# Altium PCB ESP32PCBc[1].PcbDoc (part 1 of 3)
Units mil, origin at the board's own origin, x right, y up, seen from the top; angles counter-clockwise.
Board outline 5118.11 x 3346.46 mil, 4 copper layers (L1, L2, L3, L4), stack 61.583 mil thick; 55 components, 53 nets, 223 pads, 182 vias.
Unrouted connection lines stored in the file: 1.
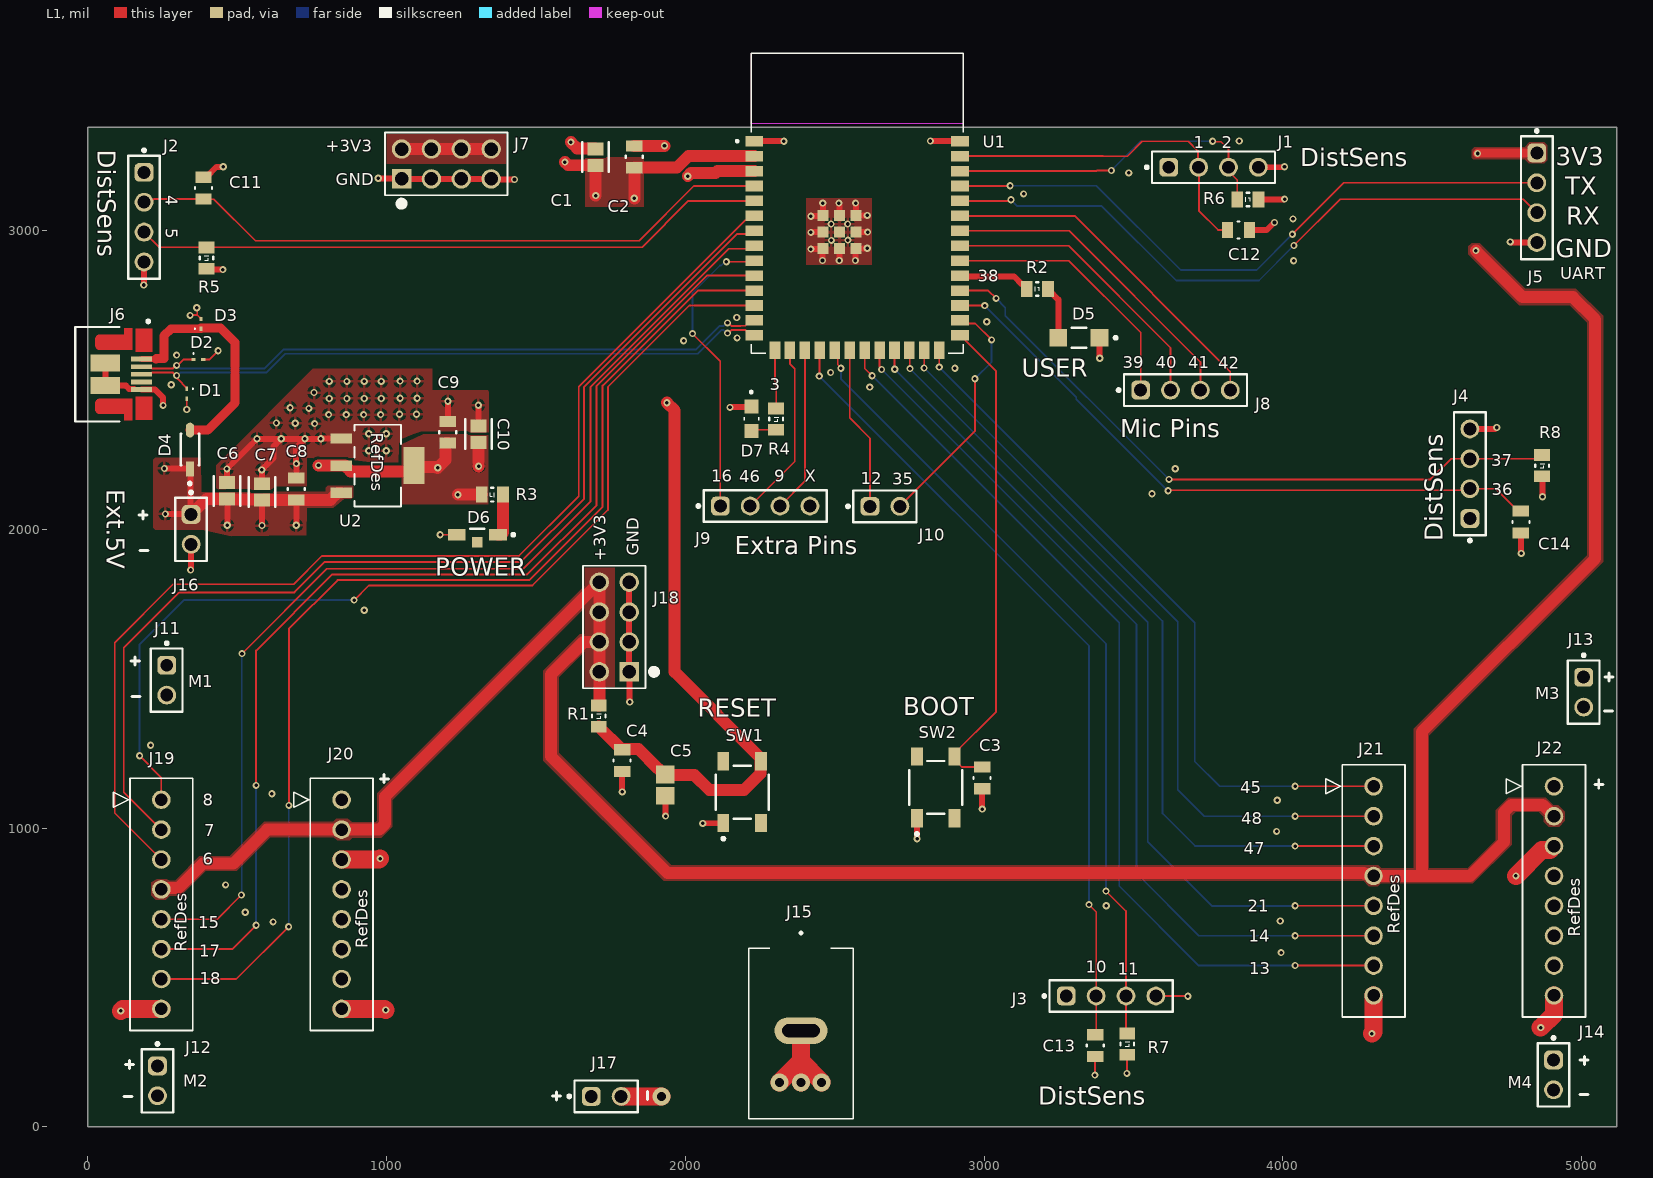
[diagram p0: L1 view]
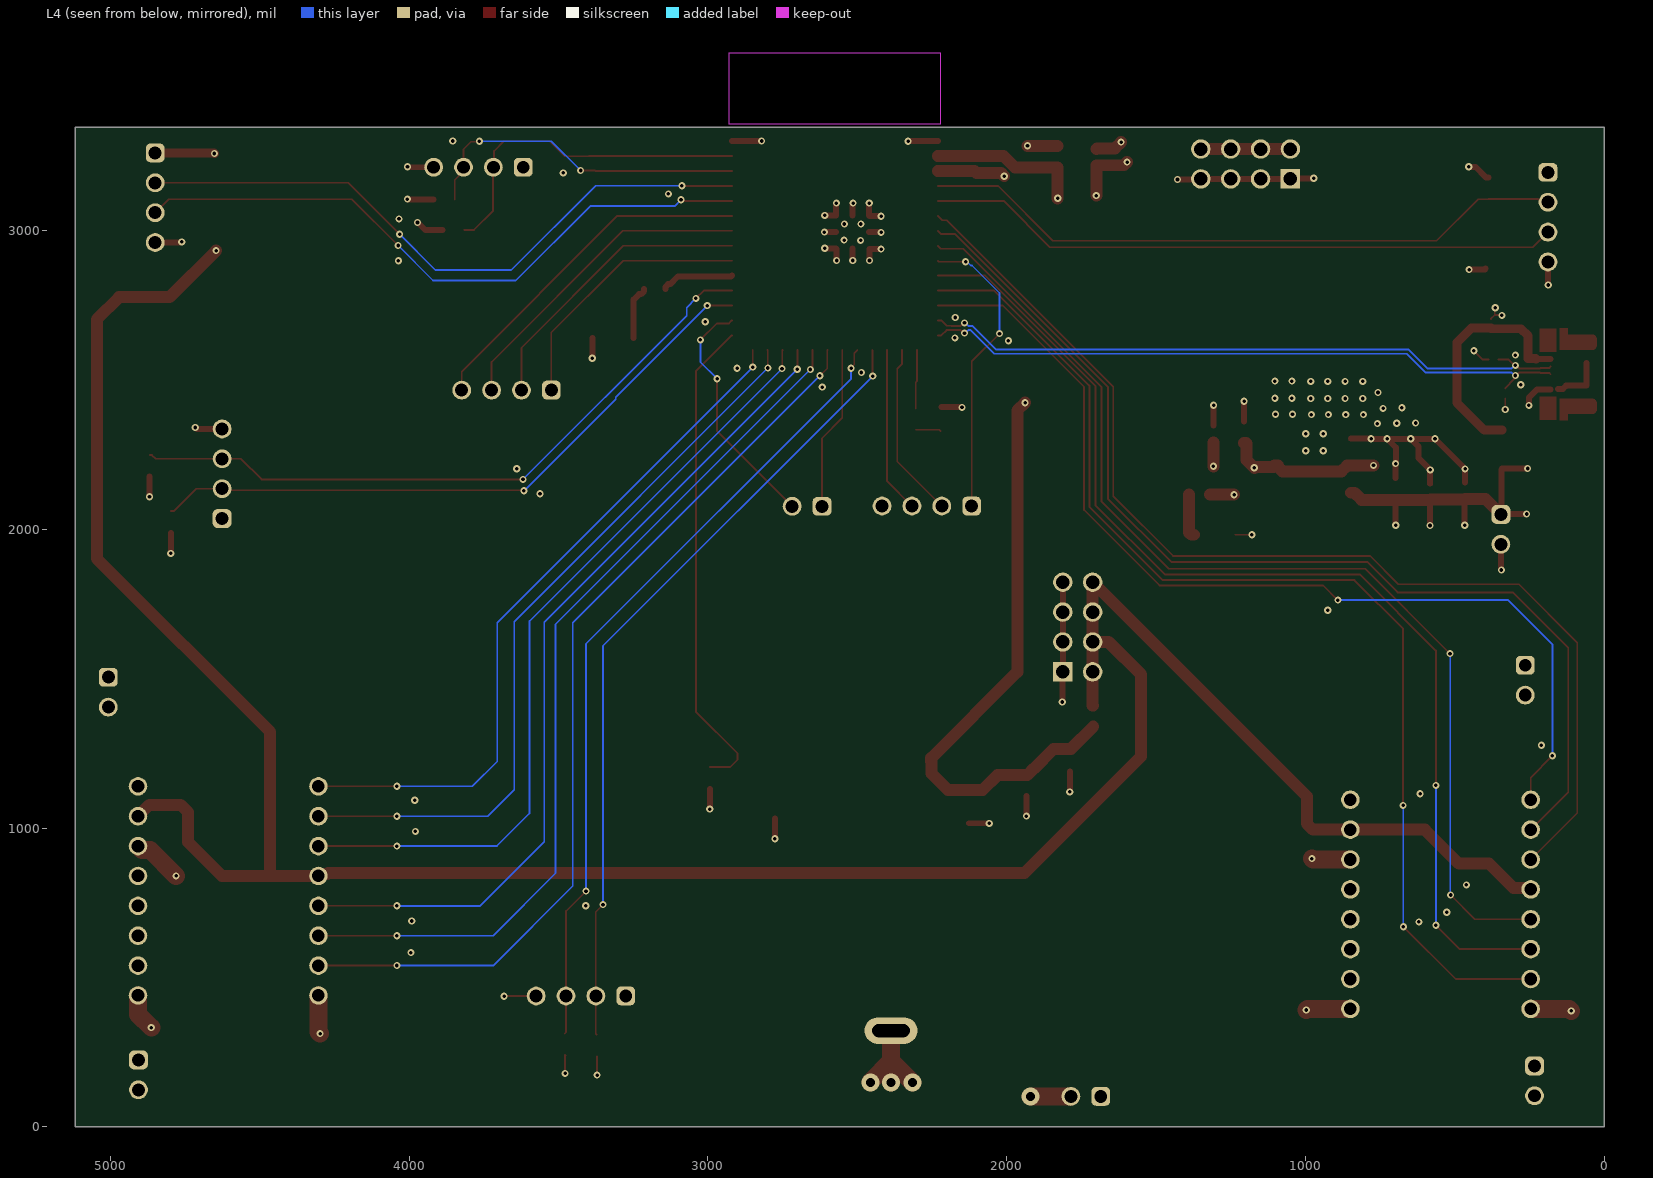
[diagram p1: L4 view, seen from below]
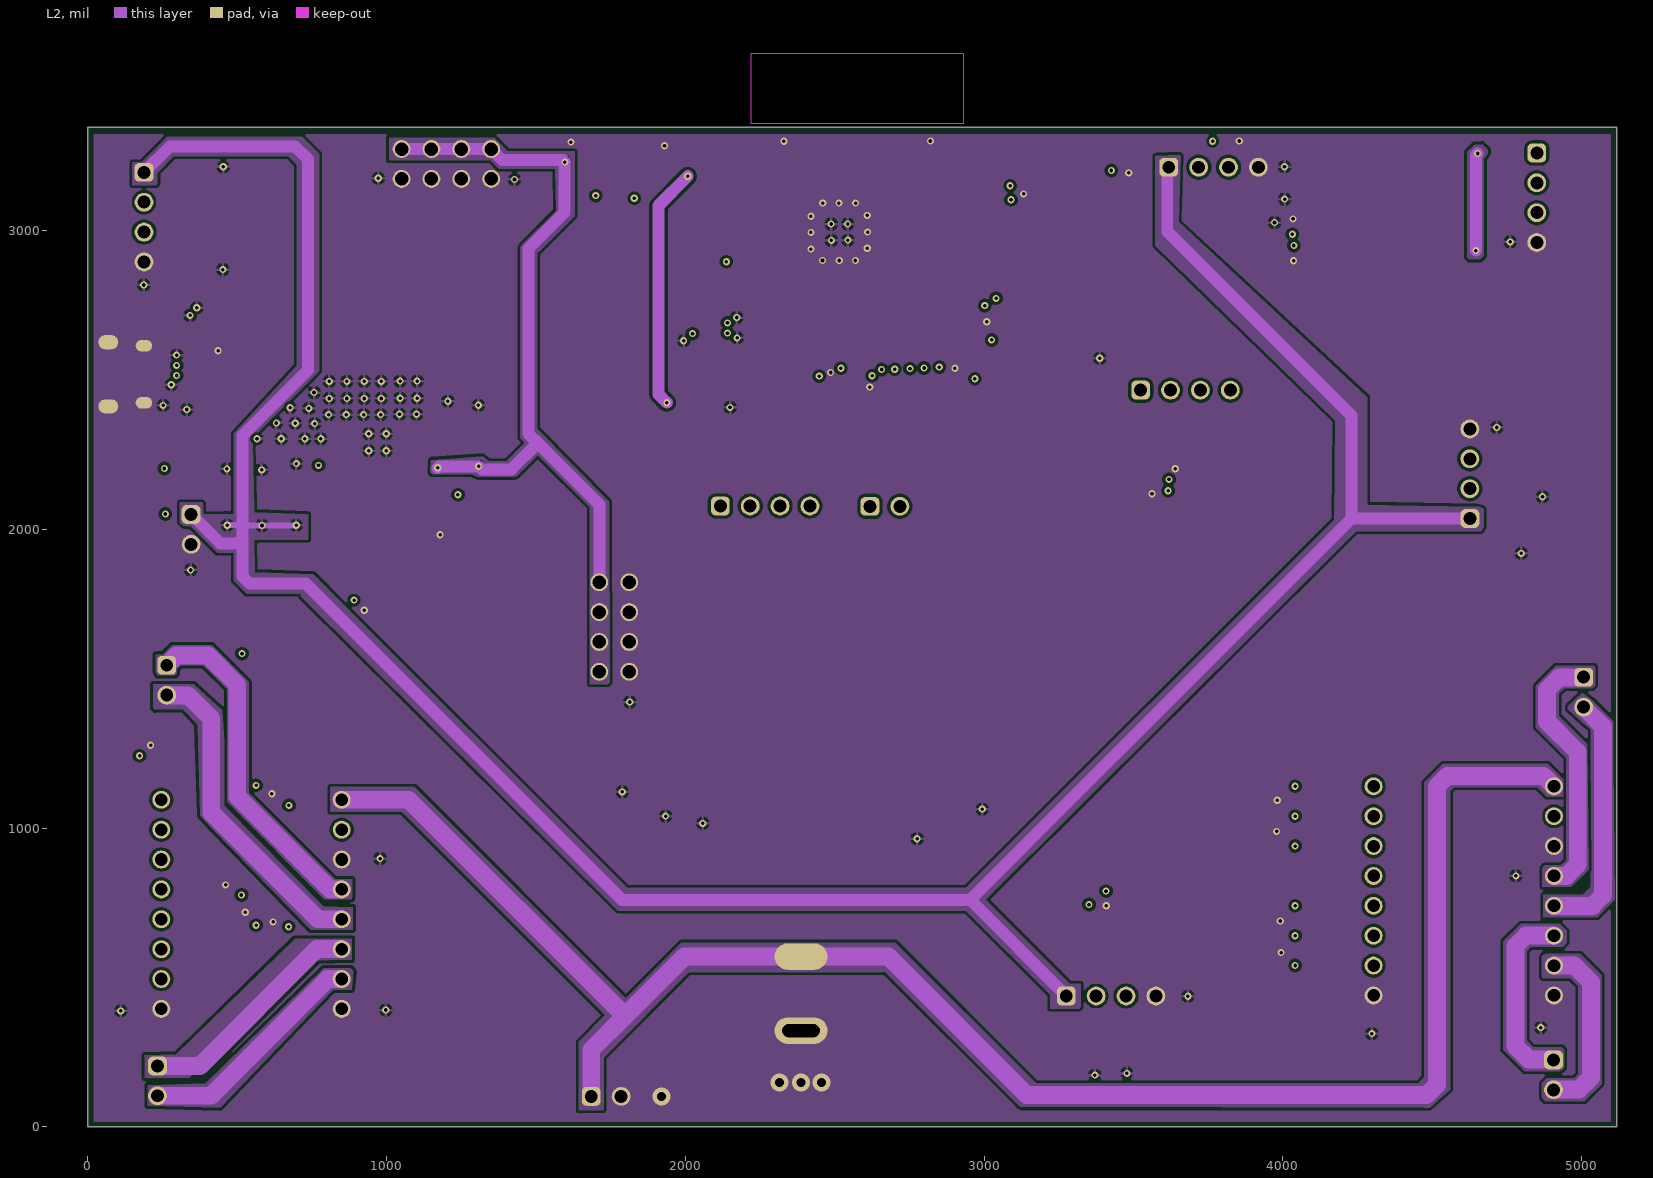
[diagram p2: L2]
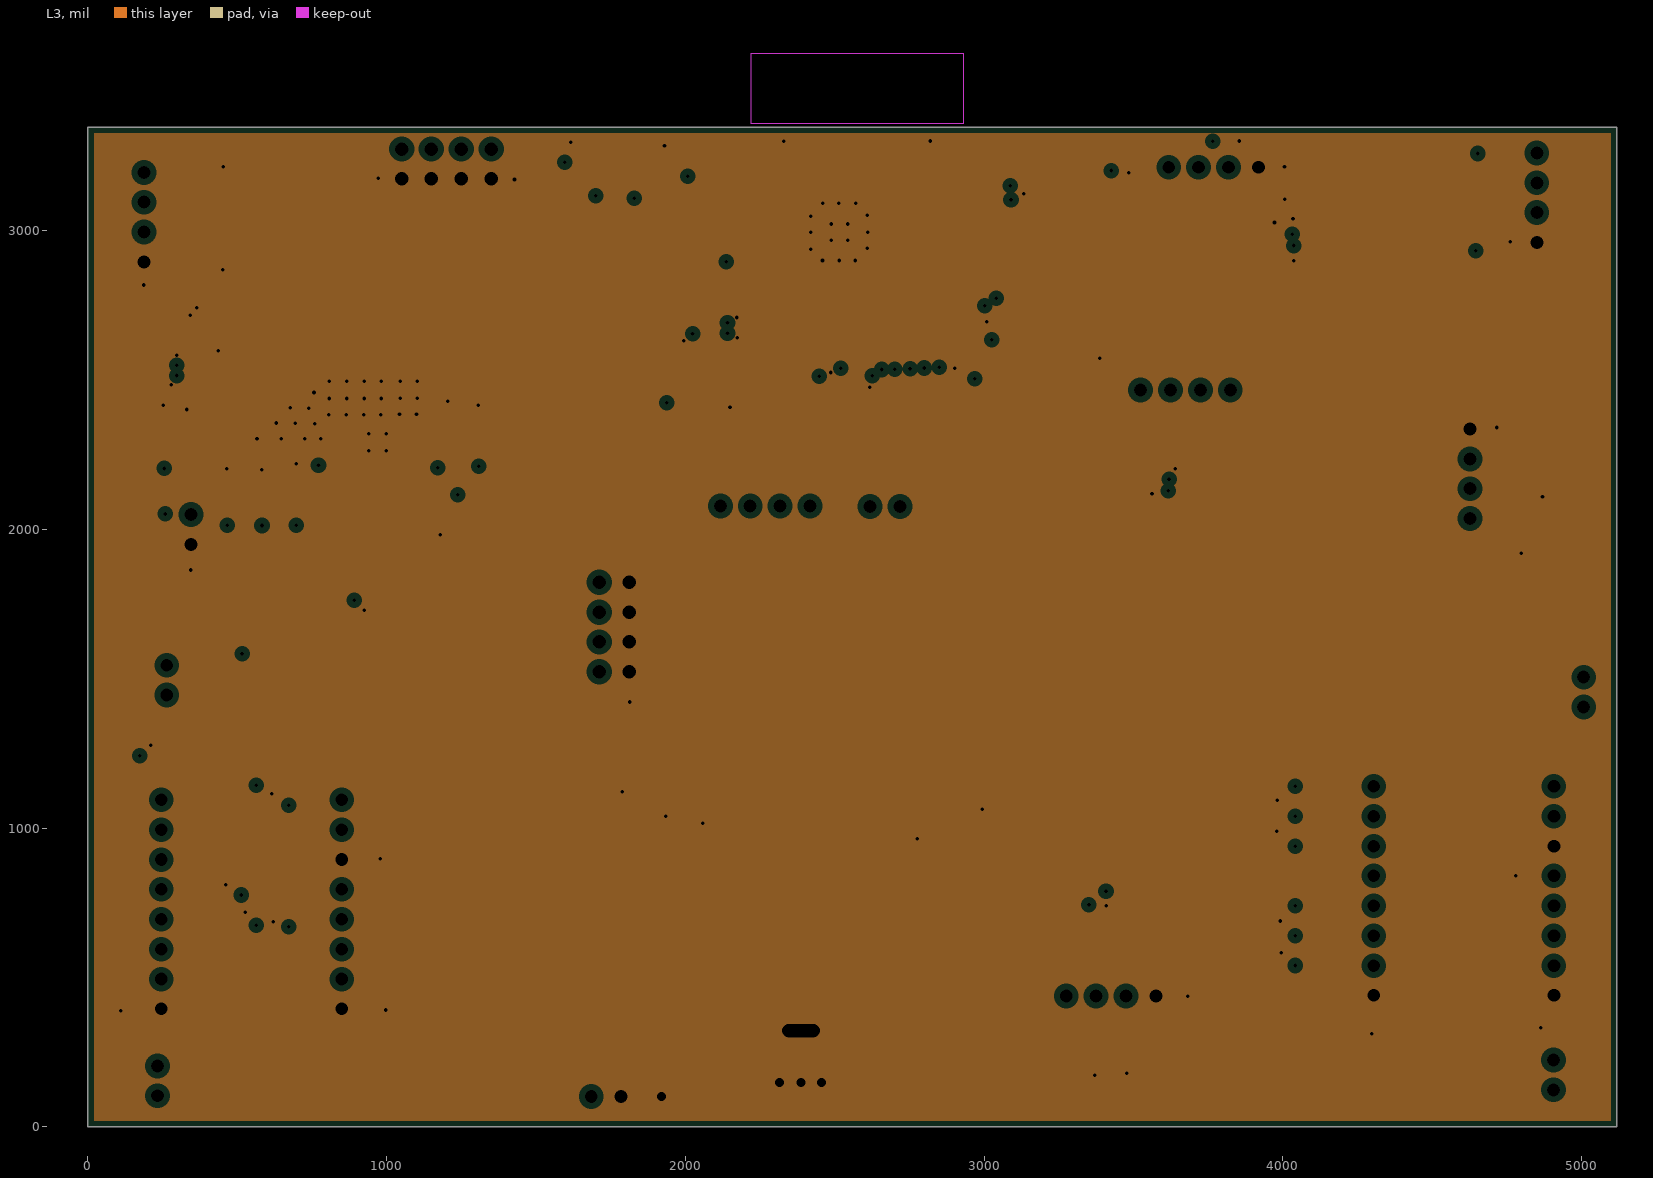
[diagram p3: L3, clearances drawn from the general rule]
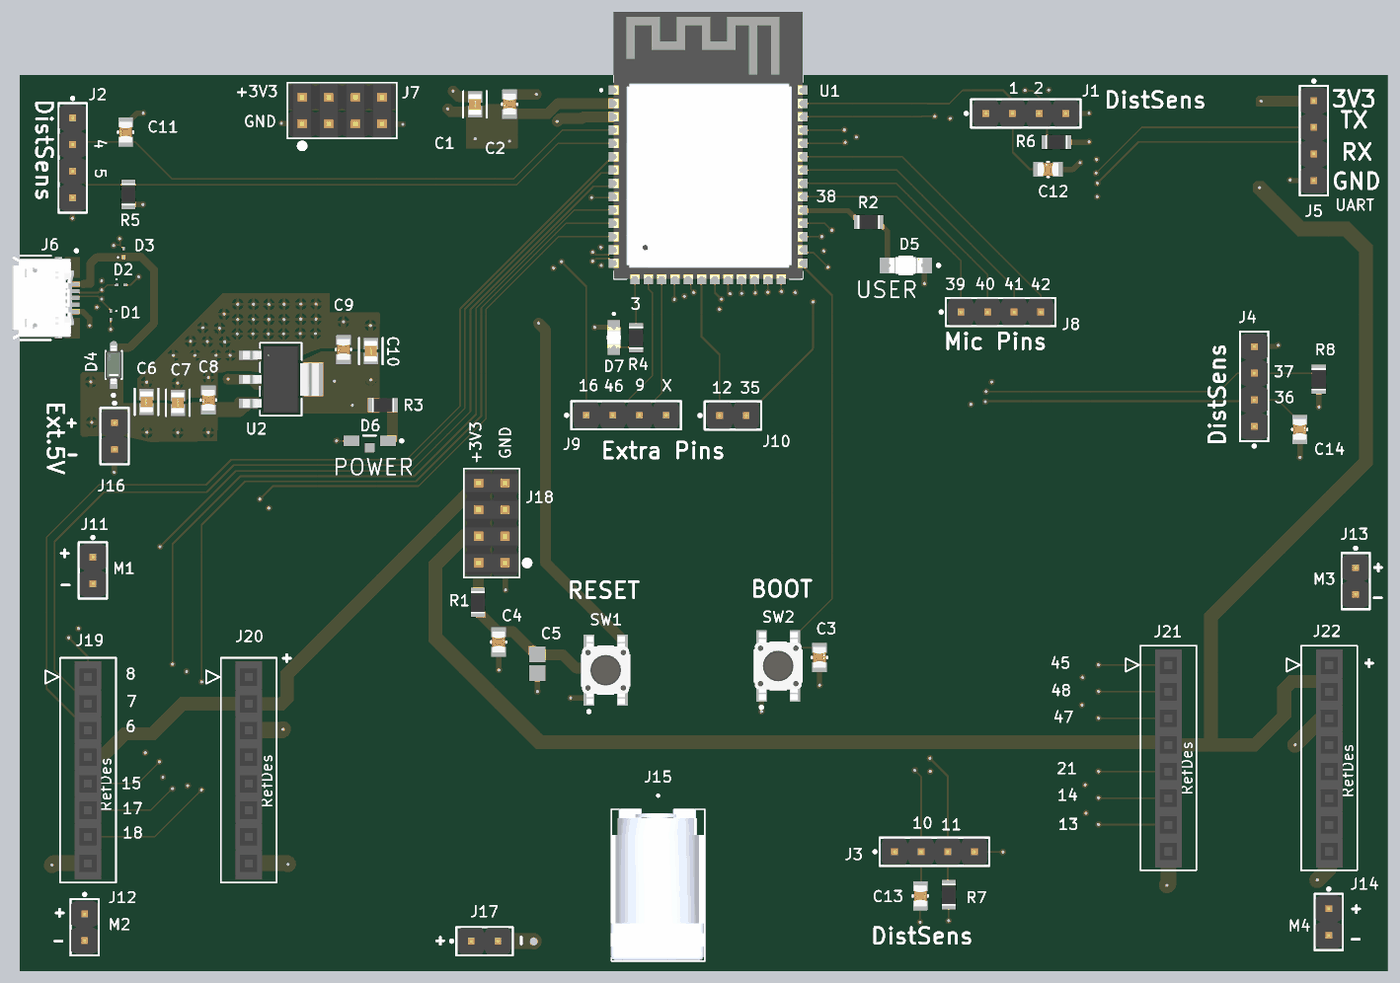
[diagram p4: 3D render of the assembled board from above, using the file's embedded part models]

## Layer stack, top to bottom
Top Solder: solder mask 0.4, Solder Resist, Dk 3.5
L1: signal copper 1.378
Dielectric 2: prepreg 3.9134, PP-006, Dk 4.1
L2: signal copper 0.5984
Dielectric 1: dielectric 49.8031, FR-4, Dk 4.8
L3: plane copper 0.5984, net GND
Dielectric 3: prepreg 3.9134, PP-006, Dk 4.1
L4: signal copper 1.378
Bottom Solder: solder mask 0.4, Solder Resist, Dk 3.5

## Board outline
0,0 5118.11,0 5118.11,3346.46 0,3346.46

## Design rules (kind name [scope] priority, off if disabled: settings)
Clearance "Diff90 s" [InDifferentialPairClass('DIFF90')] p1: gap=10 ignorepadtopadclearanceinfootprint=FALSE except(6: Arc-SMDPad Track-SMDPad SMDPad-SMDPad; 8: Arc-Arc Arc-Track Track-Track)
Clearance Small [WithinRoom('5Vusbnstuff')] p2: gap=10 ignorepadtopadclearanceinfootprint=FALSE except(6: Arc-Arc Arc-Track Arc-SMDPad Track-Track Track-SMDPad SMDPad-SMDPad)
Clearance [All] p3: gap=10 ignorepadtopadclearanceinfootprint=FALSE except(6: Arc-Arc Arc-Track Arc-SMDPad Track-Track Track-SMDPad SMDPad-SMDPad)
DiffPairsRouting DIFF90 [InDifferentialPairClass('DIFF90')] p1: maxlimit=10 minlimit=8 mostfreqgap=10 toplayer_maxgap=8.1 toplayer_prefgap=8 toplayer_minwidth=6.23 toplayer_maxwidth=6.43 toplayer_prefwidth=6.23 midlayer1_mingap=10 midlayer1_minwidth=15 midlayer1_maxwidth=15 midlayer1_prefwidth=15 bottomlayer_maxgap=8.1 bottomlayer_prefgap=8 bottomlayer_minwidth=6.23 bottomlayer_maxwidth=6.43 bottomlayer_prefwidth=6.23 maxuncoupledlength=500
HoleSize [All] p1: absolutevalues=TRUE maxlimit=150 minlimit=1 maxpercent=80.000 minpercent=20.000
MinimumSolderMaskSliver [All] p1: minsoldermaskwidth=4
PlaneClearance [All] p1: clearance=20
PlaneConnect [All] p1: pad.planeconnectstyle=Relief pad.reliefexpansion=20 pad.reliefentries=4 pad.reliefconductorwidth=20 pad.reliefairgap=10 via.planeconnectstyle=Direct via.reliefexpansion=20 via.reliefentries=4 via.reliefconductorwidth=10 via.reliefairgap=10
PolygonConnect [All] p1: connectstyle=Direct reliefconductorwidth=10 reliefentries=4 polygonreliefangle="90 Angle" airgapwidth=10
RoomDefinition 5Vusbnstuff [False] p1: confinementstyle=ConfineIn formatcopy=TRUE lockcomponents=FALSE outline 141,2582 217,2582 217,2534 141,2534
RoutingVias 12V_GND [InNet('GND')] p1: holewidth=30 width=60 viastyle="Through Hole" minholewidth=12 minwidth=24 maxholewidth=30 maxwidth=60
RoutingVias "12V Vias" [InNet('12V')] p2: holewidth=30 width=60 viastyle="Through Hole" minholewidth=0 minwidth=0 maxholewidth=30 maxwidth=60
RoutingVias [All] p3: holewidth=12 width=24 viastyle="Through Hole" minholewidth=12 minwidth=24 maxholewidth=12 maxwidth=24
SilkToSolderMaskClearance [IsPad] p1: minsilkscreentomaskgap=6 clearancetoexposedcopper=TRUE
SolderMaskExpansion [All] p1: expansion=2 istentingtop=FALSE
SupplyNets "Schematic Supply Nets_3" [InNet('VCC_5V')] p1: voltage=0.000
SupplyNets "Schematic Supply Nets_2" [InNet('12V')] p2: voltage=0.000
SupplyNets "Schematic Supply Nets_1" [InNet('GND')] p3: voltage=0.000
SupplyNets "Schematic Supply Nets" [InNet('3V3')] p4: voltage=0.000
Width [All] p1: maxlimit=100 minlimit=6 preferedwidth=10 minimp=50.000000 maximp=50.000000 favimp=50.000000
24 further rules are at their usual default settings.

## Classes and differential pairs
differential pair class DIFF90: USB
differential pair USB: +USB_P -USB_N

## Components (designator, comment, footprint, x,y, rotation, side; value= is the part's Value field where it differs from the comment)
C1 "10uF" FP-C0805C106K3PACTU-IPC_C 1699,3246 r270 top value=10µF
C2 "New100nFCap" FP-CC0805-0_85-MFG 1829,3247 r270 top value=100nF
C3 "New100nFCap" FP-CC0805-0_85-MFG 2993,1168 r90 top value=100nF
C4 "New100nFCap" FP-CC0805-0_85-MFG 1788,1226 r90 top value=100nF
C5 "New1uFCap" CAPC2013X140X50ML20T25 1933,1144 r270 top value=1µF
C6 "10uF" FP-C0805C106K3PACTU-IPC_C 465.54,2128.45 r270 top value=10µF
C7 "10uF" FP-C0805C106K3PACTU-IPC_C 583,2125 r270 top value=10µF
C8 "New100nFCap" FP-CC0805-0_85-MFG 698,2135 r270 top value=100nF
C9 "New100nFCap" FP-CC0805-0_85-MFG 1205,2325 r270 top value=100nF
C10 "10uF" FP-C0805C106K3PACTU-IPC_C 1308,2319 r270 top value=10µF
C11 "New100nFCap" FP-CC0805-0_85-MFG 387,3142 r270 top value=100nF
C12 "New100nFCap" FP-CC0805-0_85-MFG 3851.58,3002 r180 top value=100nF
C13 "New100nFCap" FP-CC0805-0_85-MFG 3372,272 r90 top value=100nF
C14 "New100nFCap" FP-CC0805-0_85-MFG 4797,2024.58 r90 top value=100nF
D1 "ESD DIODE" ONSC-SOD-923-2-514AB-01_V 331,2454 r270 top value=15pF
D2 "ESD DIODE" ONSC-SOD-923-2-514AB-01_V 370,2568 r0 top value=15pF
D3 "ESD DIODE" ONSC-SOD-923-2-514AB-01_V 379.05,2687.9 r90 top value=15pF
D4 "Schottky Diode" FP-SOD123-IPC_B 341.95,2267.2 r90 top value=50pF
D5 "RED LED" FP-HSMS-C150-MFG 3317.31,2641.14 r180 top
D6 "GREEN LED" AVAG-HSMX-C110_V 1303.82,1981.9 r180 top
D7 "YELLOW LED" LED_HSMY-C170 2221,2370 r90 top
J1 "4-Pin Header" 61300411121 3768,3212 r0 top
J2 "4-Pin Header" 61300411121 188,3045 r270 top
J3 "4-Pin Header" 61300411121 3425,438 r0 top
J4 "4-Pin Header" 61300411121 4626,2186 r90 top
J5 "4-Pin Header" 61300411121 4850,3110 r270 top
J6 "Micro USB" FCI-10103594-0001LF_V 123,2519 r270 top
J7 "8pin" TSW-104-07-G-D_SAI 1050,3173 r0 top
J8 "4-Pin Header" 61300411121 3674,2466 r0 top
J9 "4-Pin Header" 61300411121 2267,2078 r0 top
J10 "2pinheader" 61300211121 2668,2077 r0 top
J11 "2pinheader" 61300211121 264,1495 r270 top
J12 "2pinheader" 61300211121 233,154 r270 top
J13 "2pinheader" 61300211121 5007,1455 r270 top
J14 "2pinheader" 61300211121 4906,174 r270 top
J15 "DCjack" CUI_PJ-037B 2387,570.03 r270 top
J16 "2pinheader" 61300211121 345.5,1999.94 r270 top
J17 "2pinheader" 61300211121 1735,102 r0 top
J18 "8pin" TSW-104-07-G-D_SAI 1812,1523 r90 top
J19 "8pinLineHeader" PPTC081LFBN-RC 245.83,1094.76 r90 top locked
J20 "8pinLineHeader" PPTC081LFBN-RC 849.45,1094.76 r90 top locked
J21 "8pinLineHeader" PPTC081LFBN-RC 4303.54,1139.76 r90 top locked
J22 "8pinLineHeader" PPTC081LFBN-RC 4907.54,1139.76 r90 top locked
R1 "new10KRes" RESC2013X60X35NL10T20 1710,1375 r270 top value=10kΩ
R2 "New1kRes" RESC2013X60X35NL10T20 3178,2804 r0 top value=1kΩ
R3 "New1kRes" RESC2013X60X35NL10T20 1354,2116 r180 top value=1kΩ
R4 "New1kRes" RESC2013X60X35NL10T20 2304,2369 r270 top value=1kΩ
R5 "new10KRes" RESC2013X60X35NL10T20 397,2908 r270 top value=10kΩ
R6 "new10KRes" RESC2013X60X35NL10T20 3883,3104 r0 top value=10kΩ
R7 "new10KRes" RESC2013X60X35NL10T20 3479,277 r270 top value=10kΩ
R8 "new10KRes" RESC2013X60X35NL10T20 4868,2213 r270 top value=10kΩ
SW1 "PTS647SM38SMTR2LFS" FP-PTS647SM38SMTR2LFS-MFG 2190,1120 r90 top
SW2 "PTS647SM38SMTR2LFS" FP-PTS647SM38SMTR2LFS-MFG 2838,1136 r90 top
U1 "ESP32-S3-WROOM-1-N8R8_1" XCVR_ESP32S3WROOM1N8R8 2575,3092.13 r0 top locked
U2 "LM1117MPX-33NOPB" SOT223-318H_OSI 970,2213 r270 top

## Footprints (in the part's own frame and the unit in brackets; to place one, negate y for a bottom-side part, rotate by r counter-clockwise, add the part's x,y. Pads: shape width x height; smd on the part's side, far side on the other; paste and mask are expansions set on the pad)
61300211121 [mm] "Pin Header, pitch 2.54 mm, THT, Vertical, single row, 2p"
  rrect50% 1.6x1.6 hole 1.1: 1(-1.27,0)
  round 1.6 hole 1.1: 2(1.27,0)
  silkscreen extent -3.26,-1.35 2.69,1.35, body extent -2.54,-1.27 2.54,1.27, height 8.57
61300411121 [mm] "Pin Header, pitch 2.54 mm, THT, Vertical, single row, 4p"
  rrect50% 1.6x1.6 hole 1.1: 1(-3.81,0)
  round 1.6 hole 1.1: 2(-1.27,0) 3(1.27,0) 4(3.81,0)
  silkscreen extent -5.8,-1.35 5.23,1.35, body extent -5.08,-1.27 5.08,1.27, height 8.57
AVAG-HSMX-C110_V [mm] "SMD, 3-Leads, Body 3.2x1mm"
  rect 1.5x1 smd: 1(-1.75,0) 2(1.75,0)
  rect 0.9x0.9 smd: 3(0,0.65)
  silkscreen extent -3.17,-0.5 0.6,0.12, body extent -1.6,-0.5 1.6,0.5, height 1.6
CAPC2013X140X50ML20T25 [mm] "Chip Capacitor, 2-Leads, Body 2.00x1.25mm, IPC Low Density"
  rect 1.5x1.55 smd: 1(-0.9,0) 2(0.9,0)
  body extent -1.1,-0.72 1.1,0.72, height 1.4
CUI_PJ-037B [mm]
  oval 2.25x4.5 on Mid1: 1(0,0)
  oval 2.25x4.5 hole 1.1 slot 3.2 at 90 deg: 2(6.3,0)
  silkscreen extent -2.1,-4.45 13.8,4.45, body extent -0.76,-4.53 13.74,4.37, height 10.95
FCI-10103594-0001LF_V [mm] "SMD, 5-Leads, Body 8.04x5.62mm, Pitch 0.65 mm"
  rect 0.4x1.75 smd: 1(-1.3,1.435) 2(-0.65,1.435) 3(0,1.435) 4(0.65,1.435) 5(1.3,1.435)
  oval 1x1.4 on Mid1: 6(-2.425,1.64) 7(2.425,1.64)
  oval 1.2x1.7 on Mid1: 8(2.725,-1.39) 9(-2.725,-1.39)
  rect 1.425x2.5 smd: 10(-0.962,-1.64) 11(0.962,-1.64)
  L1 region: 3.9,2.37 1.9,2.37 1.9,0.91 3.9,0.91
  L1 region: -3.9,0.91 -1.9,0.91 -1.9,2.37 -3.9,2.37
  L1 region: 3.375,-0.04 3.375,-2.09 3.373,-2.129 3.369,-2.167 3.365,-2.185 3.359,-2.203 3.348,-2.239 3.329,-2.277 3.308,-2.312 3.284,-2.344 3.258,-2.374 3.227,-2.401 3.194,-2.426 3.158,-2.446 3.121,-2.464 3.08,-2.477 3.049,-2.483 3.012,-2.488 2.975,-2.49 2.475,-2.49 2.432,-2.488 2.391,-2.481 2.351,-2.471 2.312,-2.456 2.28,-2.439 2.249,-2.421 2.217,-2.396 2.19,-2.37 2.164,-2.342 2.143,-2.312 2.121,-2.277 2.105,-2.241 2.093,-2.209 2.088,-2.192 2.084,-2.175 2.08,-2.155 2.076,-2.134 2.075,-2.112 2.075,-2.09 2.075,-0.04 2.075,0.66 3.9,0.66 3.9,-0.04
  L1 region: -3.375,-0.04 -3.375,-2.09 -3.373,-2.129 -3.369,-2.167 -3.365,-2.185 -3.359,-2.203 -3.348,-2.239 -3.329,-2.277 -3.308,-2.312 -3.284,-2.344 -3.258,-2.374 -3.227,-2.401 -3.194,-2.426 -3.158,-2.446 -3.121,-2.464 -3.08,-2.477 -3.049,-2.483 -3.012,-2.488 -2.975,-2.49 -2.475,-2.49 -2.432,-2.488 -2.391,-2.482 -2.351,-2.471 -2.312,-2.456 -2.28,-2.439 -2.249,-2.421 -2.217,-2.397 -2.19,-2.37 -2.164,-2.342 -2.143,-2.312 -2.121,-2.277 -2.105,-2.241 -2.093,-2.209 -2.088,-2.192 -2.084,-2.175 -2.08,-2.155 -2.076,-2.134 -2.075,-2.112 -2.075,-2.09 -2.075,-0.04 -2.075,0.66 -3.9,0.66 -3.9,-0.04
  silkscreen extent -4.62,-4.21 4.02,2.13, body extent -4.02,-4.15 4.02,1.88, height 2.9
FP-C0805C106K3PACTU-IPC_C [mil]
  rect 43.49x53.39 smd paste+0 mask+0: 1(-27.59,0) 2(27.59,0)
  silkscreen extent -49,-44 49,44, body extent -53,-32 53,32, height 10
FP-CC0805-0_85-MFG [mm]
  rect 0.95x1.4 smd paste+0 mask+0: 1(-0.925,0) 2(0.925,0)
  silkscreen extent -0.08,-0.72 0.08,0.72, body extent -1.6,-1.05 1.6,1.05, height 0.25
FP-HSMS-C150-MFG [mm]
  rect 1.5x1.5 smd paste+0 mask+0: 1(-1.75,0) 2(1.75,0)
  silkscreen extent -3.25,-0.85 0.63,0.85, body extent -2.6,-0.95 2.6,0.95, height 0.25
FP-PTS647SM38SMTR2LFS-MFG [mm]
  rect 1.55x1 smd paste+0 mask+0: 1(-2.625,1.6) 2(2.625,1.6) 3(-2.625,-1.6) 4(2.625,-1.6)
  silkscreen extent -4.07,-2.25 2.25,2.25, body extent -3.5,-2.42 3.5,2.42, height 0.25
FP-SOD123-IPC_B [mil]
  rect 49.51x27.66 smd paste+0 mask+0: 1(-64.98,0)
  rrect100% 49.51x27.66 smd paste+0 mask+0: 2(64.98,0)
  silkscreen extent -119,-31 52,31, body extent -100,-40 100,40, height 10
LED_HSMY-C170 [mm]
  rect 1.2x1.2 smd: 1(1.05,0) 2(-1.05,0)
  silkscreen extent -0.13,-0.63 2.37,0.63, body extent -1,-0.63 1,0.63, height 0.8
ONSC-SOD-923-2-514AB-01_V [mm] "SOD, 2-Leads, Body 0.8x0.6mm"
  rect 0.36x0.25 smd: 1(-0.42,0) 2(0.42,0)
  silkscreen extent -0.47,0.48 -0.37,0.58, body extent -0.4,-0.3 0.4,0.3, height 0.4
PPTC081LFBN-RC [mil]
  round 62 / inner round 60 / far side round 62 hole 42 paste-99999 mask+0: 1(0,0) 2(-100,0) 3(-200,0) 4(-300,0) 5(-400,0) 6(-500,0) 7(-600,0) 8(-700,0)
  silkscreen extent -772,-105 72,160, body extent -761,-50 59,50, height 335
RESC2013X60X35NL10T20 [mm] "Chip Resistor, 2-Leads, Body 2.1x1.35mm, IPC Medium Density"
  rect 1x1.35 smd: 1(-0.9,0) 2(0.9,0)
  silkscreen extent -0.18,-0.58 0.18,0.58, body extent -1.05,-0.68 1.05,0.67, height 0.6
SOT223-318H_OSI [mil]
  rect 34x71 smd paste+0 mask+0: 1(-90.55,-122) 2(0,-122) 3(90.55,-122)
  rect 124x71 smd: 2(0,122)
  silkscreen extent -137,-78 137,78, body extent -132,-144 132,144, height 71
TSW-104-07-G-D_SAI [mil]
  rect 65x65 / inner round 60 / far side rect 65x65 hole 45 paste-99999 mask+0: 1(0,0)
  round 65 / inner round 60 / far side round 65 hole 45 paste-99999 mask+0: 2(100,0) 3(200,0) 4(300,0) 5(300,100) 6(200,100) 7(100,100) 8(0,100)
  silkscreen extent -55,-93 355,155, body extent -50,-50 350,150, height 330
XCVR_ESP32S3WROOM1N8R8 [mm]
  rect 1.5x0.9 smd: 1(-8.75,5.26) 2(-8.75,3.99) 3(-8.75,2.72) 4(-8.75,1.45) 5(-8.75,0.18) 6(-8.75,-1.09) 7(-8.75,-2.36) 8(-8.75,-3.63) 9(-8.75,-4.9) 10(-8.75,-6.17) 11(-8.75,-7.44) 12(-8.75,-8.71) 13(-8.75,-9.98) 14(-8.75,-11.25) 27(8.75,-11.25) 28(8.75,-9.98) 29(8.75,-8.71) 30(8.75,-7.44) 31(8.75,-6.17) 32(8.75,-4.9) 33(8.75,-3.63) 34(8.75,-2.36) 35(8.75,-1.09) 36(8.75,0.18) 37(8.75,1.45) 38(8.75,2.72) 39(8.75,3.99) 40(8.75,5.26)
  rect 0.9x1.5 smd: 15(-6.985,-12.5) 16(-5.715,-12.5) 17(-4.445,-12.5) 18(-3.175,-12.5) 19(-1.905,-12.5) 20(-0.635,-12.5) 21(0.635,-12.5) 22(1.905,-12.5) 23(3.175,-12.5) 24(4.445,-12.5) 25(5.715,-12.5) 26(6.985,-12.5)
  rect 0.9x0.9 smd: 41_1(-1.5,-2.46) 41_2(-2.9,-2.46) 41_3(-0.1,-2.46) 41_4(-2.9,-3.86) 41_5(-1.5,-3.86) 41_6(-0.1,-3.86) 41_7(-2.9,-1.06) 41_8(-1.5,-1.06) 41_9(-0.1,-1.06)
  Keep-Out Layer region: 9,6.75 -9,6.75 -9,12.75 9,12.75
  Keep-Out Layer region: 9,6.75 -9,6.75 -9,12.75 9,12.75
  silkscreen extent -10.3,-12.75 9,12.75, body extent -9,-12.75 9,12.75, height 3.25

## Part data
C1 C6 C7 C10: library part C0805C106K3PACTU, "0805 C 10UF Ceramic Multilayer Capacitor, 25 VDC, +85DEGC, X5R Dielec, +/-10%", Case Code (Imperial)=0805, Case Code (Metric)=2012, Dielectric=X5R, Dielectric Material=Ceramic, Manufacturer=KEMET, Max Operating Temperature=85°C, Min Operating Temperature=-55°C, Supplier Part Number=399-11939-1-ND, Tolerance=10%, Voltage=25V, Case/Package=0805, Category="Ceramic Capacitors", China RoHS=Compliant, ComponentLink1Description=https://datasheet.octopart.com:443/C0805C106K3PAC7800-KEMET-datasheet-179100169.pdf?src-supplier=IHS, ComponentLink1URL=https://datasheet.octopart.com:443/C0805C106K3PAC7800-KEMET-datasheet-179100169.pdf?src-supplier=IHS, ComponentLink2Description=https://datasheet.octopart.com:443/C0805C106K3PACTU-KEMET-datasheet-178499189.pdf?src-supplier=IHS, ComponentLink2URL=https://datasheet.octopart.com:443/C0805C106K3PACTU-KEMET-datasheet-178499189.pdf?src-supplier=IHS, ComponentLink3Description=https://datasheet.octopart.com:443/C0805C106K3PACTU-KEMET-datasheet-137357760.pdf?src-supplier=Upverter, ComponentLink3URL=https://datasheet.octopart.com:443/C0805C106K3PACTU-KEMET-datasheet-137357760.pdf?src-supplier=Upverter, ComponentLink4Description=https://datasheet.octopart.com:443/C0805C106K3PACTU-KEMET-datasheet-149523942.pdf?src-supplier=Farnell, ComponentLink4URL=https://datasheet.octopart.com:443/C0805C106K3PACTU-KEMET-datasheet-149523942.pdf?src-supplier=Farnell, ComponentLink5Description=https://datasheet.octopart.com:443/C0805C106K3PACTU-KEMET-datasheet-102649117.pdf?src-supplier=Farnell, ComponentLink5URL=https://datasheet.octopart.com:443/C0805C106K3PACTU-KEMET-datasheet-102649117.pdf?src-supplier=Farnell, ComponentLink6Description=https://datasheet.octopart.com:443/C0805C106K3PACTU-KEMET-datasheet-181957627.pdf?src-supplier=Farnell, ComponentLink6URL=https://datasheet.octopart.com:443/C0805C106K3PACTU-KEMET-datasheet-181957627.pdf?src-supplier=Farnell, ComponentLink7Description=https://datasheet.octopart.com:443/C0805C106K3PACTU-KEMET-datasheet-181957626.pdf?src-supplier=Farnell, ComponentLink7URL=https://datasheet.octopart.com:443/C0805C106K3PACTU-KEMET-datasheet-181957626.pdf?src-supplier=Farnell, ComponentLink8Description=https://datasheet.octopart.com:443/C0805C106K3PACTU-KEMET-datasheet-83957821.pdf?src-supplier=TME, ComponentLink8URL=https://datasheet.octopart.com:443/C0805C106K3PACTU-KEMET-datasheet-83957821.pdf?src-supplier=TME, ComponentLink9Description=https://datasheet.octopart.com:443/C0805C106K3PACTU-KEMET-datasheet-101383854.pdf?src-supplier=TME, ComponentLink9URL=https://datasheet.octopart.com:443/C0805C106K3PACTU-KEMET-datasheet-101383854.pdf?src-supplier=TME, ComponentLink10Description=https://datasheet.octopart.com:443/C0805C106K3PACTU-Kemet-datasheet-46909776.pdf?src-supplier=element14+APAC, ComponentLink10URL=https://datasheet.octopart.com:443/C0805C106K3PACTU-Kemet-datasheet-46909776.pdf?src-supplier=element14+APAC, ComponentLink11Description=https://datasheet.octopart.com:443/C0805C106K3PACTU-Kemet-datasheet-66076755.pdf?src-supplier=element14+APAC, ComponentLink11URL=https://datasheet.octopart.com:443/C0805C106K3PACTU-Kemet-datasheet-66076755.pdf?src-supplier=element14+APAC, ComponentLink12Description=https://datasheet.octopart.com:443/C0805C106K3PACTU-KEMET-datasheet-81638446.pdf?src-supplier=Newark, ComponentLink12URL=https://datasheet.octopart.com:443/C0805C106K3PACTU-KEMET-datasheet-81638446.pdf?src-supplier=Newark, ComponentLink13Description=https://datasheet.octopart.com:443/C0805C106K3PACTU-KEMET-datasheet-176289602.pdf?src-supplier=Newark, ComponentLink13URL=https://datasheet.octopart.com:443/C0805C106K3PACTU-KEMET-datasheet-176289602.pdf?src-supplier=Newark, ComponentLink14Description=https://datasheet.octopart.com:443/C0805C106K3PACTU-KEMET-datasheet-86448548.pdf?src-supplier=Newark, ComponentLink14URL=https://datasheet.octopart.com:443/C0805C106K3PACTU-KEMET-datasheet-86448548.pdf?src-supplier=Newark, ComponentLink15Description=https://datasheet.octopart.com:443/C0805C106K3PACTU-KEMET-datasheet-110724400.pdf?src-supplier=RS+(Formerly+Allied+Electronics), ComponentLink15URL=https://datasheet.octopart.com:443/C0805C106K3PACTU-KEMET-datasheet-110724400.pdf?src-supplier=RS+(Formerly+Allied+Electronics), ComponentLink16Description=https://datasheet.octopart.com/C0805C106K3PACTU-KEMET-datasheet-84169754.pdf, ComponentLink16URL=https://datasheet.octopart.com/C0805C106K3PACTU-KEMET-datasheet-84169754.pdf, Depth=1.25mm, Dissipation Factor=10%, Height=1.25mm, Lead Free="Lead Free", Length=2mm, Lifecycle Status=Production, Manufacturer Part Number=C0805C106K3PACTU, Material=Ceramic, Mounting Technology="Surface Mount", Number of Terminals=2, Packaging="Cut Tape", Pricing="1=0.22, 10=0.126, 50=0.0902, 100=0.0793, 500=0.0609, 1000=0.05524 (USD)", REACH SVHC=Yes, RoHS=Compliant, Schedule B=8532240020, Stock=104809, Supplier=DigiKey, Termination=Solder, Voltage Rating=25V, Voltage Rating (DC)=25V, Width=1.25mm
C2 C3 C4 C8 C9 C11 C12 C13 C14: library part C0805C104K3RACTU, "25V 100nF X7R ±10% 0805 Multilayer Ceramic Capacitors MLCC - SMD/SMT ROHS", Case Code (Imperial)=0805, Dielectric=X7R, Dielectric Material=Ceramic, Manufacturer=KEMET, Max Operating Temperature=125°C, Min Operating Temperature=-55°C, Supplier Part Number=399-C0805C104K3RACTUCT-ND, Temperature Coefficient=30ppm/°C, Tolerance=10%, Voltage=25V, Case/Package=0805, Category="Ceramic Capacitors", China RoHS=Compliant, ComponentLink1Description=https://datasheet.octopart.com:443/C0805C104K3RACTU-KEMET-datasheet-178445679.pdf?src-supplier=IHS, ComponentLink1URL=https://datasheet.octopart.com:443/C0805C104K3RACTU-KEMET-datasheet-178445679.pdf?src-supplier=IHS, ComponentLink2Description=https://datasheet.octopart.com:443/C0805C104K3RAC7800-KEMET-datasheet-182041123.pdf?src-supplier=IHS, ComponentLink2URL=https://datasheet.octopart.com:443/C0805C104K3RAC7800-KEMET-datasheet-182041123.pdf?src-supplier=IHS, ComponentLink3Description=https://datasheet.octopart.com:443/C0805C104K3RACTU-KEMET-datasheet-137357759.pdf?src-supplier=Farnell, ComponentLink3URL=https://datasheet.octopart.com:443/C0805C104K3RACTU-KEMET-datasheet-137357759.pdf?src-supplier=Farnell, ComponentLink4Description=https://datasheet.octopart.com:443/C0805C104K3RAC-TU-Kemet-datasheet-5313890.pdf?src-supplier=Farnell, ComponentLink4URL=https://datasheet.octopart.com:443/C0805C104K3RAC-TU-Kemet-datasheet-5313890.pdf?src-supplier=Farnell, ComponentLink5Description=https://datasheet.octopart.com:443/C0805C104K3RACTU-KEMET-datasheet-100437323.pdf?src-supplier=Farnell, ComponentLink5URL=https://datasheet.octopart.com:443/C0805C104K3RACTU-KEMET-datasheet-100437323.pdf?src-supplier=Farnell, ComponentLink6Description=https://datasheet.octopart.com:443/C0805C104K3RACTU-KEMET-datasheet-176142295.pdf?src-supplier=Farnell, ComponentLink6URL=https://datasheet.octopart.com:443/C0805C104K3RACTU-KEMET-datasheet-176142295.pdf?src-supplier=Farnell, ComponentLink7Description=https://datasheet.octopart.com:443/C0805C104K3RAC-TU-Kemet-datasheet-7833651.pdf?src-supplier=Farnell, ComponentLink7URL=https://datasheet.octopart.com:443/C0805C104K3RAC-TU-Kemet-datasheet-7833651.pdf?src-supplier=Farnell, ComponentLink8Description=https://datasheet.octopart.com:443/C0805C104K3RAC-TU-Kemet-datasheet-7601896.pdf?src-supplier=Farnell, ComponentLink8URL=https://datasheet.octopart.com:443/C0805C104K3RAC-TU-Kemet-datasheet-7601896.pdf?src-supplier=Farnell, ComponentLink9Description=https://datasheet.octopart.com:443/C0805C104K3RAC-TU-Kemet-datasheet-5316294.pdf?src-supplier=Farnell, ComponentLink9URL=https://datasheet.octopart.com:443/C0805C104K3RAC-TU-Kemet-datasheet-5316294.pdf?src-supplier=Farnell, ComponentLink10Description=https://datasheet.octopart.com:443/C0805C104K3RAC-TU-Kemet-datasheet-5314837.pdf?src-supplier=Farnell, ComponentLink10URL=https://datasheet.octopart.com:443/C0805C104K3RAC-TU-Kemet-datasheet-5314837.pdf?src-supplier=Farnell, ComponentLink11Description=https://datasheet.octopart.com:443/C0805C104K3RAC-TU-Kemet-datasheet-8092359.pdf?src-supplier=Farnell, ComponentLink11URL=https://datasheet.octopart.com:443/C0805C104K3RAC-TU-Kemet-datasheet-8092359.pdf?src-supplier=Farnell, ComponentLink12Description=https://datasheet.octopart.com:443/C0805C104K3RAC-TU-Kemet-datasheet-5314449.pdf?src-supplier=Farnell, ComponentLink12URL=https://datasheet.octopart.com:443/C0805C104K3RAC-TU-Kemet-datasheet-5314449.pdf?src-supplier=Farnell, ComponentLink13Description=https://datasheet.octopart.com:443/C0805C104K3RAC-TU-Kemet-datasheet-5390537.pdf?src-supplier=Farnell, ComponentLink13URL=https://datasheet.octopart.com:443/C0805C104K3RAC-TU-Kemet-datasheet-5390537.pdf?src-supplier=Farnell, ComponentLink14Description=https://datasheet.octopart.com:443/C0805C104K3RAC-TU-Kemet-datasheet-5314969.pdf?src-supplier=Farnell, ComponentLink14URL=https://datasheet.octopart.com:443/C0805C104K3RAC-TU-Kemet-datasheet-5314969.pdf?src-supplier=Farnell, ComponentLink15Description=https://datasheet.octopart.com:443/C0805C104K3RAC-TU-Kemet-datasheet-5314627.pdf?src-supplier=Farnell, ComponentLink15URL=https://datasheet.octopart.com:443/C0805C104K3RAC-TU-Kemet-datasheet-5314627.pdf?src-supplier=Farnell, ComponentLink16Description=https://datasheet.octopart.com:443/C0805C104K3RAC-TU-Kemet-datasheet-5389132.pdf?src-supplier=Farnell, ComponentLink16URL=https://datasheet.octopart.com:443/C0805C104K3RAC-TU-Kemet-datasheet-5389132.pdf?src-supplier=Farnell, ComponentLink17Description=https://datasheet.octopart.com:443/C0805C104K3RAC-TU-Kemet-datasheet-5313836.pdf?src-supplier=Farnell, ComponentLink17URL=https://datasheet.octopart.com:443/C0805C104K3RAC-TU-Kemet-datasheet-5313836.pdf?src-supplier=Farnell, ComponentLink18Description=https://datasheet.octopart.com:443/C0805C104K3RAC-TU-Kemet-datasheet-8111010.pdf?src-supplier=Farnell, ComponentLink18URL=https://datasheet.octopart.com:443/C0805C104K3RAC-TU-Kemet-datasheet-8111010.pdf?src-supplier=Farnell, ComponentLink19Description=https://datasheet.octopart.com:443/C0805C104K3RAC-TU-Kemet-datasheet-7541751.pdf?src-supplier=Farnell, ComponentLink19URL=https://datasheet.octopart.com:443/C0805C104K3RAC-TU-Kemet-datasheet-7541751.pdf?src-supplier=Farnell, ComponentLink20Description=https://datasheet.octopart.com:443/C0805C104K3RAC-TU-Kemet-datasheet-7627733.pdf?src-supplier=Farnell, ComponentLink20URL=https://datasheet.octopart.com:443/C0805C104K3RAC-TU-Kemet-datasheet-7627733.pdf?src-supplier=Farnell, ComponentLink21Description=https://datasheet.octopart.com:443/C0805C104K3RAC-TU-Kemet-datasheet-5315946.pdf?src-supplier=Farnell, ComponentLink21URL=https://datasheet.octopart.com:443/C0805C104K3RAC-TU-Kemet-datasheet-5315946.pdf?src-supplier=Farnell, ComponentLink22Description=https://datasheet.octopart.com:443/C0805C104K3RACTU-KEMET-datasheet-68331921.pdf?src-supplier=Upverter, ComponentLink22URL=https://datasheet.octopart.com:443/C0805C104K3RACTU-KEMET-datasheet-68331921.pdf?src-supplier=Upverter, ComponentLink23Description=https://datasheet.octopart.com:443/C0805C104K3RACTU-Kemet-datasheet-12608295.pdf?src-supplier=element14+APAC, ComponentLink23URL=https://datasheet.octopart.com:443/C0805C104K3RACTU-Kemet-datasheet-12608295.pdf?src-supplier=element14+APAC, ComponentLink24Description=https://datasheet.octopart.com:443/C0805C104K3RACTU-Kemet-datasheet-11992184.pdf?src-supplier=element14+APAC, ComponentLink24URL=https://datasheet.octopart.com:443/C0805C104K3RACTU-Kemet-datasheet-11992184.pdf?src-supplier=element14+APAC, ComponentLink25Description=https://datasheet.octopart.com:443/C0805C104K3RACTU-Kemet-datasheet-10942409.pdf?src-supplier=element14+APAC, ComponentLink25URL=https://datasheet.octopart.com:443/C0805C104K3RACTU-Kemet-datasheet-10942409.pdf?src-supplier=element14+APAC, ComponentLink26Description=https://datasheet.octopart.com:443/C0805C104K3RACTU-Kemet-datasheet-10404442.pdf?src-supplier=element14+APAC, ComponentLink26URL=https://datasheet.octopart.com:443/C0805C104K3RACTU-Kemet-datasheet-10404442.pdf?src-supplier=element14+APAC, ComponentLink27Description=https://datasheet.octopart.com:443/C0805C104K3RACTU-Kemet-datasheet-66100807.pdf?src-supplier=element14+APAC, ComponentLink27URL=https://datasheet.octopart.com:443/C0805C104K3RACTU-Kemet-datasheet-66100807.pdf?src-supplier=element14+APAC, ComponentLink28Description=https://datasheet.octopart.com:443/C0805C104K3RACTU-Kemet-datasheet-32036385.pdf?src-supplier=element14+APAC, ComponentLink28URL=https://datasheet.octopart.com:443/C0805C104K3RACTU-Kemet-datasheet-32036385.pdf?src-supplier=element14+APAC, ComponentLink29Description=https://datasheet.octopart.com:443/C0805C104K3RACTU-KEMET-datasheet-37550250.pdf?src-supplier=Electro+Sonic, ComponentLink29URL=https://datasheet.octopart.com:443/C0805C104K3RACTU-KEMET-datasheet-37550250.pdf?src-supplier=Electro+Sonic, ComponentLink30Description=https://datasheet.octopart.com:443/C0805C104K3RACTU-KEMET-datasheet-176289588.pdf?src-supplier=Newark, ComponentLink30URL=https://datasheet.octopart.com:443/C0805C104K3RACTU-KEMET-datasheet-176289588.pdf?src-supplier=Newark, ComponentLink31Description=https://datasheet.octopart.com:443/C0805C104K3RACTU-Kemet-datasheet-27203261.pdf?src-supplier=Newark, ComponentLink31URL=https://datasheet.octopart.com:443/C0805C104K3RACTU-Kemet-datasheet-27203261.pdf?src-supplier=Newark, ComponentLink32Description=https://datasheet.octopart.com:443/C0805C104K3RACTU-KEMET-datasheet-164512540.pdf?src-supplier=TME, ComponentLink32URL=https://datasheet.octopart.com:443/C0805C104K3RACTU-KEMET-datasheet-164512540.pdf?src-supplier=TME, ComponentLink33Description=https://datasheet.octopart.com:443/C0805C104K3RACTU-Kemet-datasheet-67847105.pdf?src-supplier=TME, ComponentLink33URL=https://datasheet.octopart.com:443/C0805C104K3RACTU-Kemet-datasheet-67847105.pdf?src-supplier=TME, ComponentLink34Description=https://datasheet.octopart.com:443/C0805C104K3RACTU-KEMET-datasheet-68331906.pdf?src-supplier=TME, ComponentLink34URL=https://datasheet.octopart.com:443/C0805C104K3RACTU-KEMET-datasheet-68331906.pdf?src-supplier=TME, ComponentLink35Description=https://datasheet.octopart.com:443/C0805C104K3RACTU-KEMET-datasheet-110724412.pdf?src-supplier=RS+(Formerly+Allied+Electronics), ComponentLink35URL=https://datasheet.octopart.com:443/C0805C104K3RACTU-KEMET-datasheet-110724412.pdf?src-supplier=RS+(Formerly+Allied+Electronics), ComponentLink36Description=https://datasheet.octopart.com:443/C0805C104K3RACTU-Kemet-datasheet-464.pdf?src-supplier=RS+(Formerly+Allied+Electronics), ComponentLink36URL=https://datasheet.octopart.com:443/C0805C104K3RACTU-Kemet-datasheet-464.pdf?src-supplier=RS+(Formerly+Allied+Electronics), ComponentLink37Description=https://datasheet.octopart.com/C0805C104K3RACTU-KEMET-datasheet-84169754.pdf, ComponentLink37URL=https://datasheet.octopart.com/C0805C104K3RACTU-KEMET-datasheet-84169754.pdf, ComponentLink38Description=https://datasheet.octopart.com:443/C0805C104K3RACTU-Kemet-datasheet-11780474.pdf?src-supplier=Arrow+Electronics, ComponentLink38URL=https://datasheet.octopart.com:443/C0805C104K3RACTU-Kemet-datasheet-11780474.pdf?src-supplier=Arrow+Electronics, ComponentLink39Description=https://datasheet.octopart.com:443/C0805C104K3RAC-TU-Kemet-datasheet-7628246.pdf?src-supplier=Jameco, ComponentLink39URL=https://datasheet.octopart.com:443/C0805C104K3RAC-TU-Kemet-datasheet-7628246.pdf?src-supplier=Jameco, Contact Plating=Tin, Depth=1.25mm, Height=780µm, Lead Free="Lead Free", Lead Pitch=750µm, Length=2mm, Lifecycle Status=Production, Manufacturer Part Number=C0805C104K3RACTU, Material=Ceramic, Mounting Technology="Surface Mount", Number of Terminals=2, Packaging="Cut Tape", Pins=2, Pricing="1=0.11, 10=0.062, 50=0.0428, 100=0.0371, 500=0.02736, 1000=0.02438, 4000=0.01952, 8000=0.01719, 12000=0.01709, 20000=0.01653, 28000=0.016, 40000=0.01548, 48000=0.01524, 96000=0.01442, 100000=0.01438 (USD)", Radiation Hardening=No, REACH SVHC=Yes, RoHS=Compliant, Schedule B="8532240020, 8532240020|8532240020|8532240020|8532240020|8532240020", Stock=1480282, Supplier=DigiKey, Termination=SMD/SMT, Thickness=889µm, Voltage Rating=25V, Voltage Rating (DC)=25V, Width=1.25mm
C5: library part C0805C105K3RACTU, "Multilayer Ceramic Capacitors MLCC – SMD/SMT; KEMET; C0805C105K3RACTU; 1 µF; 0805; 25 V; 25 V", Case Code (Imperial)=0805, Case Code (Metric)=2012, Dielectric=X7R, Dielectric Material=Ceramic, Manufacturer=KEMET, Max Operating Temperature=125°C, Min Operating Temperature=-55°C, Supplier Part Number=399-C0805C105K3RACTUDKR-ND, Tolerance=10%, Voltage=25V, Case/Package=0805, Category="Ceramic Capacitors", China RoHS=Compliant, ComponentLink1Description=https://datasheet.octopart.com:443/C0805C105K3RACTU-KEMET-datasheet-178445679.pdf?src-supplier=IHS, ComponentLink1URL=https://datasheet.octopart.com:443/C0805C105K3RACTU-KEMET-datasheet-178445679.pdf?src-supplier=IHS, ComponentLink2Description=https://datasheet.octopart.com:443/C0805C105K3RACTU-KEMET-datasheet-137357759.pdf?src-supplier=Farnell, ComponentLink2URL=https://datasheet.octopart.com:443/C0805C105K3RACTU-KEMET-datasheet-137357759.pdf?src-supplier=Farnell, ComponentLink3Description=https://datasheet.octopart.com:443/C0805C105K3RACTU-Kemet-datasheet-5313890.pdf?src-supplier=Farnell, ComponentLink3URL=https://datasheet.octopart.com:443/C0805C105K3RACTU-Kemet-datasheet-5313890.pdf?src-supplier=Farnell, ComponentLink4Description=https://datasheet.octopart.com:443/C0805C105K3RACTU-KEMET-datasheet-32036385.pdf?src-supplier=Farnell, ComponentLink4URL=https://datasheet.octopart.com:443/C0805C105K3RACTU-KEMET-datasheet-32036385.pdf?src-supplier=Farnell, ComponentLink5Description=https://datasheet.octopart.com:443/C0805C105K3RACTU-Kemet-datasheet-8764837.pdf?src-supplier=Farnell, ComponentLink5URL=https://datasheet.octopart.com:443/C0805C105K3RACTU-Kemet-datasheet-8764837.pdf?src-supplier=Farnell, ComponentLink6Description=https://datasheet.octopart.com:443/C0805C105K3RACTU-Kemet-datasheet-8480123.pdf?src-supplier=Farnell, ComponentLink6URL=https://datasheet.octopart.com:443/C0805C105K3RACTU-Kemet-datasheet-8480123.pdf?src-supplier=Farnell, ComponentLink7Description=https://datasheet.octopart.com:443/C0805C105K3RACTU-Kemet-datasheet-5390537.pdf?src-supplier=Farnell, ComponentLink7URL=https://datasheet.octopart.com:443/C0805C105K3RACTU-Kemet-datasheet-5390537.pdf?src-supplier=Farnell, ComponentLink8Description=https://datasheet.octopart.com:443/C0805C105K3RACTU-Kemet-datasheet-5393970.pdf?src-supplier=Farnell, ComponentLink8URL=https://datasheet.octopart.com:443/C0805C105K3RACTU-Kemet-datasheet-5393970.pdf?src-supplier=Farnell, ComponentLink9Description=https://datasheet.octopart.com:443/C0805C105K3RACTU-Kemet-datasheet-8502025.pdf?src-supplier=Farnell, ComponentLink9URL=https://datasheet.octopart.com:443/C0805C105K3RACTU-Kemet-datasheet-8502025.pdf?src-supplier=Farnell, ComponentLink10Description=https://datasheet.octopart.com:443/C0805C105K3RACTU-Kemet-datasheet-7541751.pdf?src-supplier=Farnell, ComponentLink10URL=https://datasheet.octopart.com:443/C0805C105K3RACTU-Kemet-datasheet-7541751.pdf?src-supplier=Farnell, ComponentLink11Description=https://datasheet.octopart.com:443/C0805C105K3RACTU-Kemet-datasheet-161801.pdf?src-supplier=Farnell, ComponentLink11URL=https://datasheet.octopart.com:443/C0805C105K3RACTU-Kemet-datasheet-161801.pdf?src-supplier=Farnell, ComponentLink12Description=https://datasheet.octopart.com:443/C0805C105K3RACTU-KEMET-datasheet-149523912.pdf?src-supplier=Farnell, ComponentLink12URL=https://datasheet.octopart.com:443/C0805C105K3RACTU-KEMET-datasheet-149523912.pdf?src-supplier=Farnell, ComponentLink13Description=https://datasheet.octopart.com:443/C0805C105K3RACTU-KEMET-datasheet-68331906.pdf?src-supplier=Farnell, ComponentLink13URL=https://datasheet.octopart.com:443/C0805C105K3RACTU-KEMET-datasheet-68331906.pdf?src-supplier=Farnell, ComponentLink14Description=https://datasheet.octopart.com:443/C0805C105K3RACTU-KEMET-datasheet-101576158.pdf?src-supplier=Farnell, ComponentLink14URL=https://datasheet.octopart.com:443/C0805C105K3RACTU-KEMET-datasheet-101576158.pdf?src-supplier=Farnell, ComponentLink15Description=https://datasheet.octopart.com:443/C0805C105K3RACTU.-Kemet-datasheet-41232427.pdf?src-supplier=Farnell, ComponentLink15URL=https://datasheet.octopart.com:443/C0805C105K3RACTU.-Kemet-datasheet-41232427.pdf?src-supplier=Farnell, ComponentLink16Description=https://datasheet.octopart.com:443/C0805C105K3RACTU-KEMET-datasheet-176142298.pdf?src-supplier=Farnell, ComponentLink16URL=https://datasheet.octopart.com:443/C0805C105K3RACTU-KEMET-datasheet-176142298.pdf?src-supplier=Farnell, ComponentLink17Description=https://datasheet.octopart.com:443/C0805C105K3RACTU-Kemet-datasheet-5340275.pdf?src-supplier=Farnell, ComponentLink17URL=https://datasheet.octopart.com:443/C0805C105K3RACTU-Kemet-datasheet-5340275.pdf?src-supplier=Farnell, ComponentLink18Description=https://datasheet.octopart.com:443/C0805C105K3RAC7800-KEMET-datasheet-188512054.pdf?src-supplier=ODG+(Origin+Data+Global), ComponentLink18URL=https://datasheet.octopart.com:443/C0805C105K3RAC7800-KEMET-datasheet-188512054.pdf?src-supplier=ODG+(Origin+Data+Global), ComponentLink19Description=https://datasheet.octopart.com:443/C0805C105K3RACTU..-Kemet-datasheet-66413465.pdf?src-supplier=element14+APAC, ComponentLink19URL=https://datasheet.octopart.com:443/C0805C105K3RACTU..-Kemet-datasheet-66413465.pdf?src-supplier=element14+APAC, ComponentLink20Description=https://datasheet.octopart.com:443/C0805C105K3RACTU-Kemet-datasheet-23692949.pdf?src-supplier=element14+APAC, ComponentLink20URL=https://datasheet.octopart.com:443/C0805C105K3RACTU-Kemet-datasheet-23692949.pdf?src-supplier=element14+APAC, ComponentLink21Description=https://datasheet.octopart.com:443/C0805C105K3RACTU-Kemet-datasheet-22084244.pdf?src-supplier=element14+APAC, ComponentLink21URL=https://datasheet.octopart.com:443/C0805C105K3RACTU-Kemet-datasheet-22084244.pdf?src-supplier=element14+APAC, ComponentLink22Description=https://datasheet.octopart.com:443/C0805C105K3RACTU-KEMET-datasheet-176289598.pdf?src-supplier=Newark, ComponentLink22URL=https://datasheet.octopart.com:443/C0805C105K3RACTU-KEMET-datasheet-176289598.pdf?src-supplier=Newark, ComponentLink23Description=https://datasheet.octopart.com:443/C0805C105K3RACTU-Kemet-datasheet-12608295.pdf?src-supplier=Newark, ComponentLink23URL=https://datasheet.octopart.com:443/C0805C105K3RACTU-Kemet-datasheet-12608295.pdf?src-supplier=Newark, ComponentLink24Description=https://datasheet.octopart.com:443/C0805C105K3RACTU-Kemet-datasheet-11992184.pdf?src-supplier=Newark, ComponentLink24URL=https://datasheet.octopart.com:443/C0805C105K3RACTU-Kemet-datasheet-11992184.pdf?src-supplier=Newark, ComponentLink25Description=https://datasheet.octopart.com:443/C0805C105K3RACTU-Kemet-datasheet-10942409.pdf?src-supplier=Newark, ComponentLink25URL=https://datasheet.octopart.com:443/C0805C105K3RACTU-Kemet-datasheet-10942409.pdf?src-supplier=Newark, ComponentLink26Description=https://datasheet.octopart.com:443/C0805C105K3RACTU-Kemet-datasheet-10404442.pdf?src-supplier=Newark, ComponentLink26URL=https://datasheet.octopart.com:443/C0805C105K3RACTU-Kemet-datasheet-10404442.pdf?src-supplier=Newark, ComponentLink27Description=https://datasheet.octopart.com:443/C0805C105K3RACTU-KEMET-datasheet-164512540.pdf?src-supplier=TME, ComponentLink27URL=https://datasheet.octopart.com:443/C0805C105K3RACTU-KEMET-datasheet-164512540.pdf?src-supplier=TME, ComponentLink28Description=https://datasheet.octopart.com:443/C0805C105K3RACTU-Kemet-datasheet-67847111.pdf?src-supplier=TME, ComponentLink28URL=https://datasheet.octopart.com:443/C0805C105K3RACTU-Kemet-datasheet-67847111.pdf?src-supplier=TME, ComponentLink29Description=https://datasheet.octopart.com:443/C0805C105K3RACTU-KEMET-datasheet-110724412.pdf?src-supplier=RS+(Formerly+Allied+Electronics), ComponentLink29URL=https://datasheet.octopart.com:443/C0805C105K3RACTU-KEMET-datasheet-110724412.pdf?src-supplier=RS+(Formerly+Allied+Electronics), ComponentLink30Description=https://datasheet.octopart.com:443/C0805C105K3RACTU-Kemet-datasheet-464.pdf?src-supplier=RS+(Formerly+Allied+Electronics), ComponentLink30URL=https://datasheet.octopart.com:443/C0805C105K3RACTU-Kemet-datasheet-464.pdf?src-supplier=RS+(Formerly+Allied+Electronics), ComponentLink31Description=https://datasheet.octopart.com/C0805C105K3RACTU-KEMET-datasheet-84169754.pdf, ComponentLink31URL=https://datasheet.octopart.com/C0805C105K3RACTU-KEMET-datasheet-84169754.pdf, ComponentLink32Description=https://datasheet.octopart.com:443/C0805C105K3RACTU-Kemet-datasheet-11765922.pdf?src-supplier=Arrow+Electronics, ComponentLink32URL=https://datasheet.octopart.com:443/C0805C105K3RACTU-Kemet-datasheet-11765922.pdf?src-supplier=Arrow+Electronics, ComponentLink33Description=https://datasheet.octopart.com:443/C0805C105K3RAC7800-KEMET-datasheet-164857143.pdf?src-supplier=Burklin+Elektronik, ComponentLink33URL=https://datasheet.octopart.com:443/C0805C105K3RAC7800-KEMET-datasheet-164857143.pdf?src-supplier=Burklin+Elektronik, Contact Plating=Tin, Depth=1.25mm, Height=1.25mm, Length=2mm, Lifecycle Status=Production, Manufacturer Part Number=C0805C105K3RACTU, Material=Ceramic, Mounting Technology="Surface Mount", Number of Terminals=2, Pins=2, Pricing="1=0.12, 10=0.068, 50=0.0474, 100=0.041, 500=0.03044, 1000=0.02719 (USD)", Radiation Hardening=No, REACH SVHC=Yes, RoHS=Compliant, Schedule B="8532240020, 8532240020|8532240020|8532240020|8532240020|8532240020|8532240020|8532240020|8532240020|8532240020|8532240020|8532240020|8532240020|8532240020|8532240020|8532240020|8532240020|8532240020|8532240020|8532240020|8532240020|8532240020|8532240020|8532240020|85", Stock=337068, Supplier=DigiKey, Termination=SMD/SMT, Thickness=1.397mm, Voltage Rating=25V, Voltage Rating (DC)=25V, Width=1.25mm
D1 D2 D3: library part ESD9B5.0ST5G, "5.8V Bidirectional 5V SOD-923 ESD and Surge Protection (TVS/ESD) ROHS", Breakdown Voltage=6.8V, Case/Package=SOD-923-2, Clamping Voltage=12.5V, Leakage Current=1µA, Manufacturer=onsemi, Manufacturer Lifecycle Status=ACTIVE, Max Breakdown Voltage=7.8V, Max Junction Temperature (Tj)=150°C, Max Power Dissipation=300mW, Max Surge Current=1A, Min Breakdown Voltage=5.8V, Min Operating Temperature=-55°C, Operating Supply Voltage=5V, Peak Pulse Current=2A, Peak Reverse Current=100nA, Power Line Protection=No, Supplier Part Number=ESD9B5.0ST5GOSCT-ND, Test Current=1mA, Category="TVS Diodes", China RoHS=Compliant, ComponentLink1Description=https://datasheet.octopart.com:443/ESD9B5.0ST5G-onsemi-datasheet-180958915.pdf?src-supplier=IHS, ComponentLink1URL=https://datasheet.octopart.com:443/ESD9B5.0ST5G-onsemi-datasheet-180958915.pdf?src-supplier=IHS, ComponentLink2Description=https://datasheet.octopart.com:443/ESD9B5.0ST5G-ON-Semiconductor-datasheet-102157924.pdf?src-supplier=Upverter, ComponentLink2URL=https://datasheet.octopart.com:443/ESD9B5.0ST5G-ON-Semiconductor-datasheet-102157924.pdf?src-supplier=Upverter, ComponentLink3Description=https://datasheet.octopart.com:443/ESD9B5.0ST5G-onsemi-datasheet-164326709.pdf?src-supplier=Upverter, ComponentLink3URL=https://datasheet.octopart.com:443/ESD9B5.0ST5G-onsemi-datasheet-164326709.pdf?src-supplier=Upverter, ComponentLink4Description=https://sigma.octopart.com:443/141945501/technical_drawing/onsemi-ESD9B5.0ST5G.pdf?src-supplier=Upverter, ComponentLink4URL=https://sigma.octopart.com:443/141945501/technical_drawing/onsemi-ESD9B5.0ST5G.pdf?src-supplier=Upverter, ComponentLink5Description=https://datasheet.octopart.com:443/ESD9B5.0ST5G-ON-Semiconductor-datasheet-31820553.pdf?src-supplier=Upverter, ComponentLink5URL=https://datasheet.octopart.com:443/ESD9B5.0ST5G-ON-Semiconductor-datasheet-31820553.pdf?src-supplier=Upverter, ComponentLink6Description=https://datasheet.octopart.com:443/ESD9B5.0ST5G-ON-Semiconductor-datasheet-10979971.pdf?src-supplier=JRH+Electronics, ComponentLink6URL=https://datasheet.octopart.com:443/ESD9B5.0ST5G-ON-Semiconductor-datasheet-10979971.pdf?src-supplier=JRH+Electronics, ComponentLink7Description=https://datasheet.octopart.com:443/ESD9B5.0ST5G-ON-Semiconductor-datasheet-43892613.pdf?src-supplier=Newark, ComponentLink7URL=https://datasheet.octopart.com:443/ESD9B5.0ST5G-ON-Semiconductor-datasheet-43892613.pdf?src-supplier=Newark, ComponentLink8Description=https://datasheet.octopart.com:443/ESD9B5.0ST5G-ON-Semiconductor-datasheet-8324281.pdf?src-supplier=Farnell, ComponentLink8URL=https://datasheet.octopart.com:443/ESD9B5.0ST5G-ON-Semiconductor-datasheet-8324281.pdf?src-supplier=Farnell, ComponentLink9Description=https://datasheet.octopart.com:443/ESD9B5.0ST5G-onsemi-datasheet-164731318.pdf?src-supplier=ODG+(Origin+Data+Global), ComponentLink9URL=https://datasheet.octopart.com:443/ESD9B5.0ST5G-onsemi-datasheet-164731318.pdf?src-supplier=ODG+(Origin+Data+Global), ComponentLink10Description=https://datasheet.octopart.com:443/ESD9B5.0ST5G-ON-Semiconductor-datasheet-14050548.pdf?src-supplier=iiiC, ComponentLink10URL=https://datasheet.octopart.com:443/ESD9B5.0ST5G-ON-Semiconductor-datasheet-14050548.pdf?src-supplier=iiiC, ComponentLink11Description=http://sigma.octopart.com:80/15540786/rohs_certificate/ON-Semiconductor-ESD9B5.0ST5G.pdf?src-supplier=Compliance+Statements, ComponentLink11URL=http://sigma.octopart.com:80/15540786/rohs_certificate/ON-Semiconductor-ESD9B5.0ST5G.pdf?src-supplier=Compliance+Statements, ComponentLink12Description=http://sigma.octopart.com:80/15676168/materials_sheet/ON-Semiconductor-ESD9B5.0ST5G.csv?src-supplier=Compliance+Statements, ComponentLink12URL=http://sigma.octopart.com:80/15676168/materials_sheet/ON-Semiconductor-ESD9B5.0ST5G.csv?src-supplier=Compliance+Statements, ComponentLink13Description=http://sigma.octopart.com:80/150607598/rohs_statement/ON-Semiconductor-ESD9B5.0ST5G.pdf?src-supplier=Compliance+Statements, ComponentLink13URL=http://sigma.octopart.com:80/150607598/rohs_statement/ON-Semiconductor-ESD9B5.0ST5G.pdf?src-supplier=Compliance+Statements, ComponentLink14Description=http://sigma.octopart.com:80/reach_statement/ON-Semiconductor-company-79.pdf?src-supplier=Compliance+Statements, ComponentLink14URL=http://sigma.octopart.com:80/reach_statement/ON-Semiconductor-company-79.pdf?src-supplier=Compliance+Statements, ComponentLink15Description=https://octopart.com:443/opatz8j6/c1?t=XtpWH1-n59Nv97GpxeIMeHBNoxt5g4S9bQ9QnT6FqtsvICeTGkSw5iyTUKBLo0IreNXT5t3AMffPQ0sdNKdknHOm0nz1F09QQR3mOZmgbbFWUrY4RF3x-bhmC_Z-XjWywbxv9QDvbwvhpgGaRWZ5lQqCl3K795s9mZLZ92Wvm06CQ47iAhAwJvQ9SkryRdQoBq0pMJNPiTEI8WXrEODmoHD5ktIehnxnaf8ca6nm1MFYDk6vo6g3Leelyy63yO-FU8WMhohDT9xT0SK97mH-4J-vryFITMukHi1AYkEKV-tK_HgJsBQue_0FPI1KRnbIF_8MedQFCTScKvzDmqBnhH-esSUU19M39aV-Hye4&src-supplier=Compliance+Statements, ComponentLink15URL=https://octopart.com:443/opatz8j6/c1?t=XtpWH1-n59Nv97GpxeIMeHBNoxt5g4S9bQ9QnT6FqtsvICeTGkSw5iyTUKBLo0IreNXT5t3AMffPQ0sdNKdknHOm0nz1F09QQR3mOZmgbbFWUrY4RF3x-bhmC_Z-XjWywbxv9QDvbwvhpgGaRWZ5lQqCl3K795s9mZLZ92Wvm06CQ47iAhAwJvQ9SkryRdQoBq0pMJNPiTEI8WXrEODmoHD5ktIehnxnaf8ca6nm1MFYDk6vo6g3Leelyy63yO-FU8WMhohDT9xT0SK97mH-4J-vryFITMukHi1AYkEKV-tK_HgJsBQue_0FPI1KRnbIF_8MedQFCTScKvzDmqBnhH-esSUU19M39aV-Hye4&src-supplier=Compliance+Statements, ComponentLink16Description=https://octopart.com:443/opatz8j6/c1?t=ukQZya117aficN5Owusg0RdHerDMW0hZBhe1r8m_np9fwSIxwBwHeh5-IvO_UWXWH3WcOOwp_gPK3N92O5SqqlJVydiayIStyFqQOvO-Hbhs0kY7GI_m-bAamyuzgyxbeoYYxS3z_UnhuNSquB5LezYHRAQLi67e8aJSNvNkUDJzh5ZU-Qy774PXzfKH9SwEUqfzjA30ZQvTVW1KskQAX5jdhheWoVajRRb1L5lwmDODTRwD4XPTboWpzb6nOMmLPVjRCgqhZes7YdPyVxDRq8iBNm7wgEfc16MtwkTc6-eeNDmlCq1LVMxYxr7YSEfDWt893Z6Wt1Oi2NurFZ39qJh1jVO1gjbLWIchtW_FmA&src-supplier=Compliance+Statements, ComponentLink16URL=https://octopart.com:443/opatz8j6/c1?t=ukQZya117aficN5Owusg0RdHerDMW0hZBhe1r8m_np9fwSIxwBwHeh5-IvO_UWXWH3WcOOwp_gPK3N92O5SqqlJVydiayIStyFqQOvO-Hbhs0kY7GI_m-bAamyuzgyxbeoYYxS3z_UnhuNSquB5LezYHRAQLi67e8aJSNvNkUDJzh5ZU-Qy774PXzfKH9SwEUqfzjA30ZQvTVW1KskQAX5jdhheWoVajRRb1L5lwmDODTRwD4XPTboWpzb6nOMmLPVjRCgqhZes7YdPyVxDRq8iBNm7wgEfc16MtwkTc6-eeNDmlCq1LVMxYxr7YSEfDWt893Z6Wt1Oi2NurFZ39qJh1jVO1gjbLWIchtW_FmA&src-supplier=Compliance+Statements, Composition=Zener, Contact Plating=Tin, Depth=600µm, Direction=Bidirectional, Element Configuration=Single, ESD Protection=Yes, Halogen Free="Halogen Free", Height=400µm, Lead Free="Lead Free", Length=800µm, Lifecycle Status=Production, Manufacturer Part Number=ESD9B5.0ST5G, Max Operating Temperature=150°C, Max Reverse Leakage Current=1µA, Number of Bidirectional Channels=1, Number of Channels=1, Number of Elements=1, Number of Lines=1, Number of Terminals=2, Packaging="Tape and Reel", Peak Pulse Power=300mW, Pins=2, Polarity=Unidirectional, Pricing="1=0.1, 10=0.018 (USD)", Radiation Hardening=No, REACH SVHC=Yes, Reverse Breakdown Voltage=5.8V, Reverse Standoff Voltage=5V, RoHS=Compliant, Schedule B="8536300000, 8536300000|8536300000|8536300000|8536300000|8536300000|8536300000|8536300000|8536300000|8536300000|8536300000|8536300000|8536300000|8536300000|8536300000|8536300000|8536300000|8536300000|8536300000|8536300000|8536300000|8536300000|8536300000|8536300000|85", Stock=480940, Supplier=DigiKey, Termination=SMD/SMT, Width=650µm, Working Voltage=5V